# Altium PCB PDB_OS3_AlimentationV2.PcbDoc
Units mm, origin at the board's own origin, x right, y up, seen from the top; angles counter-clockwise.
Board outline 60.2 x 55.21 mm, 4 copper layers (Top Layer, Int1, In2, Bottom Layer), stack 1.552 mm thick; 11 components, 2 nets, 38 pads, 161 vias.
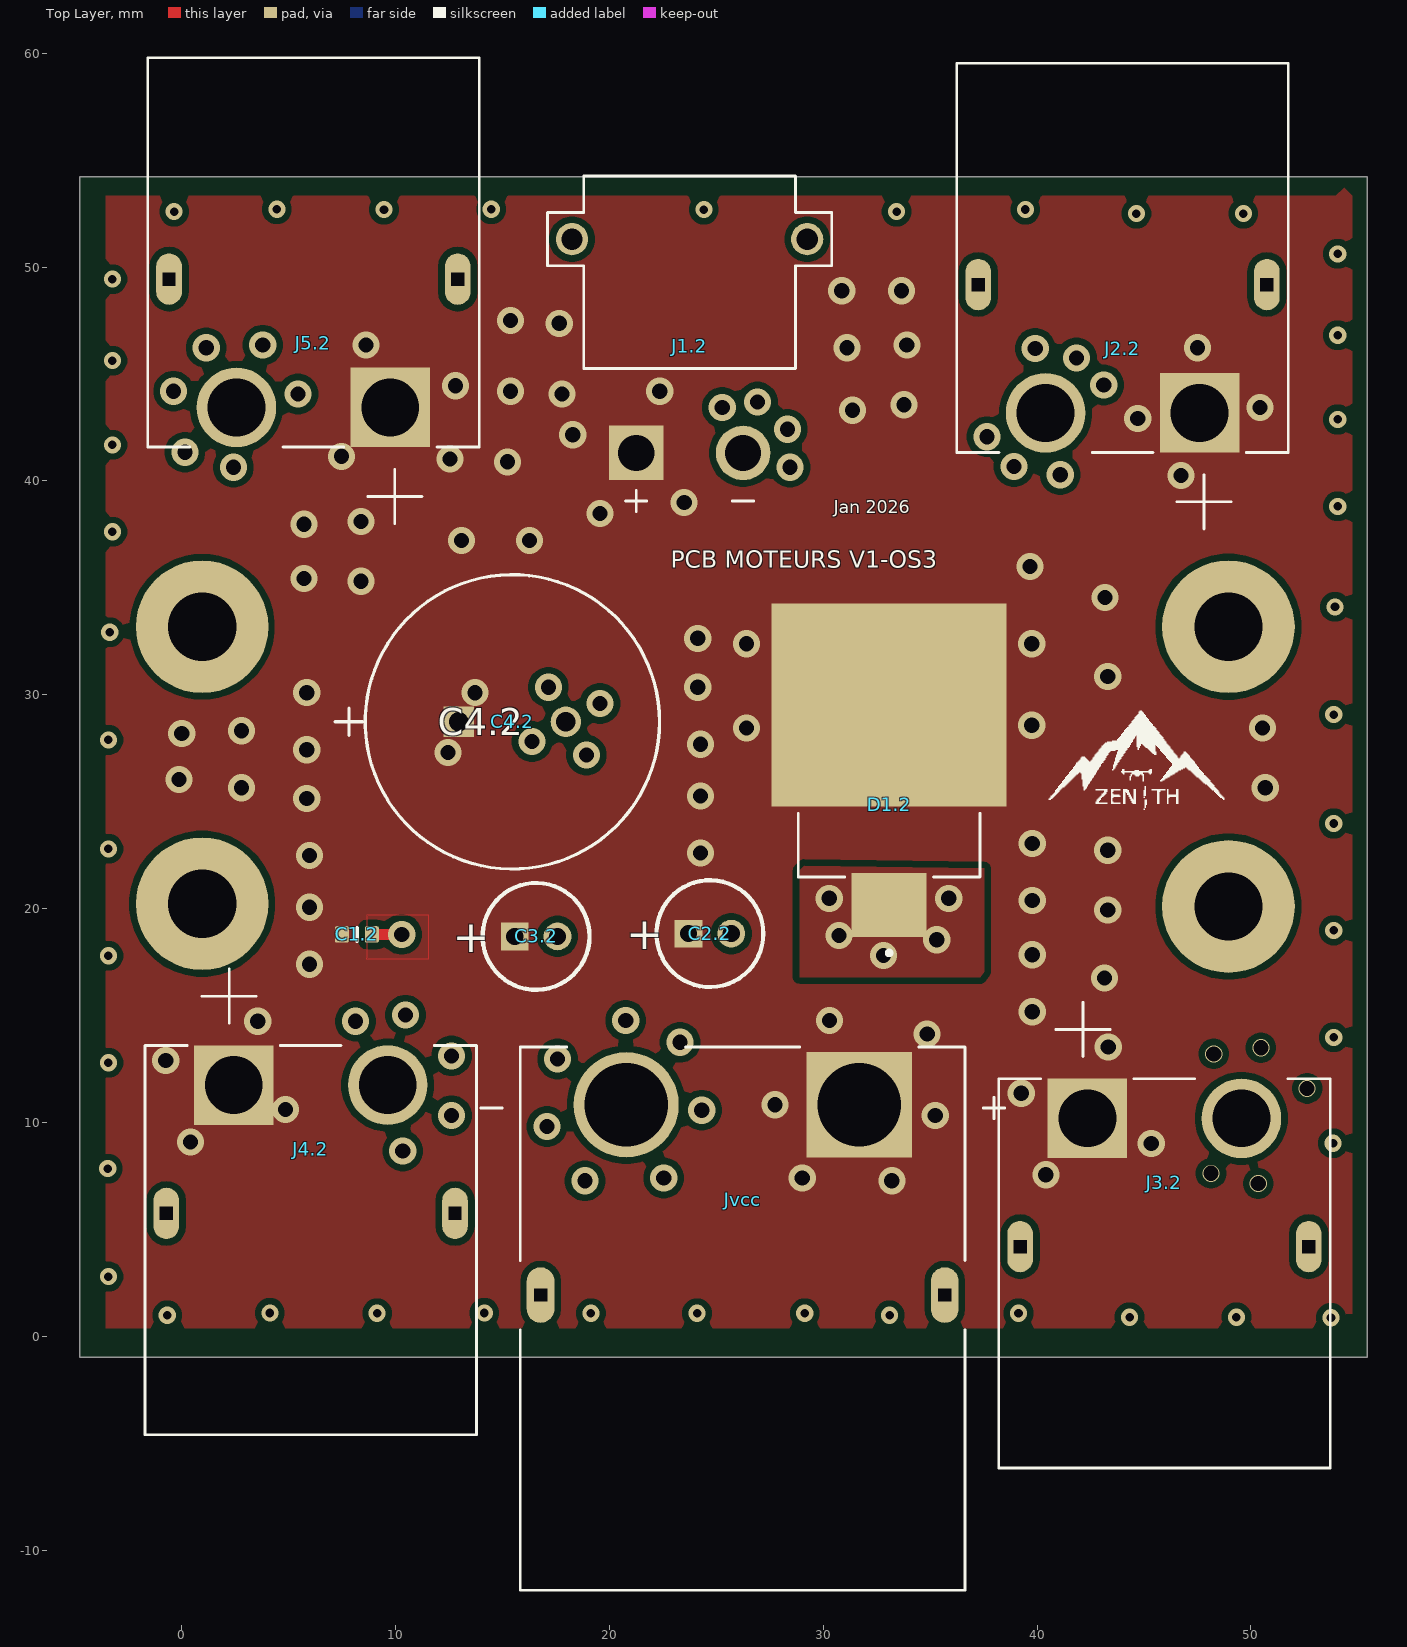
[diagram p0: Top Layer view]
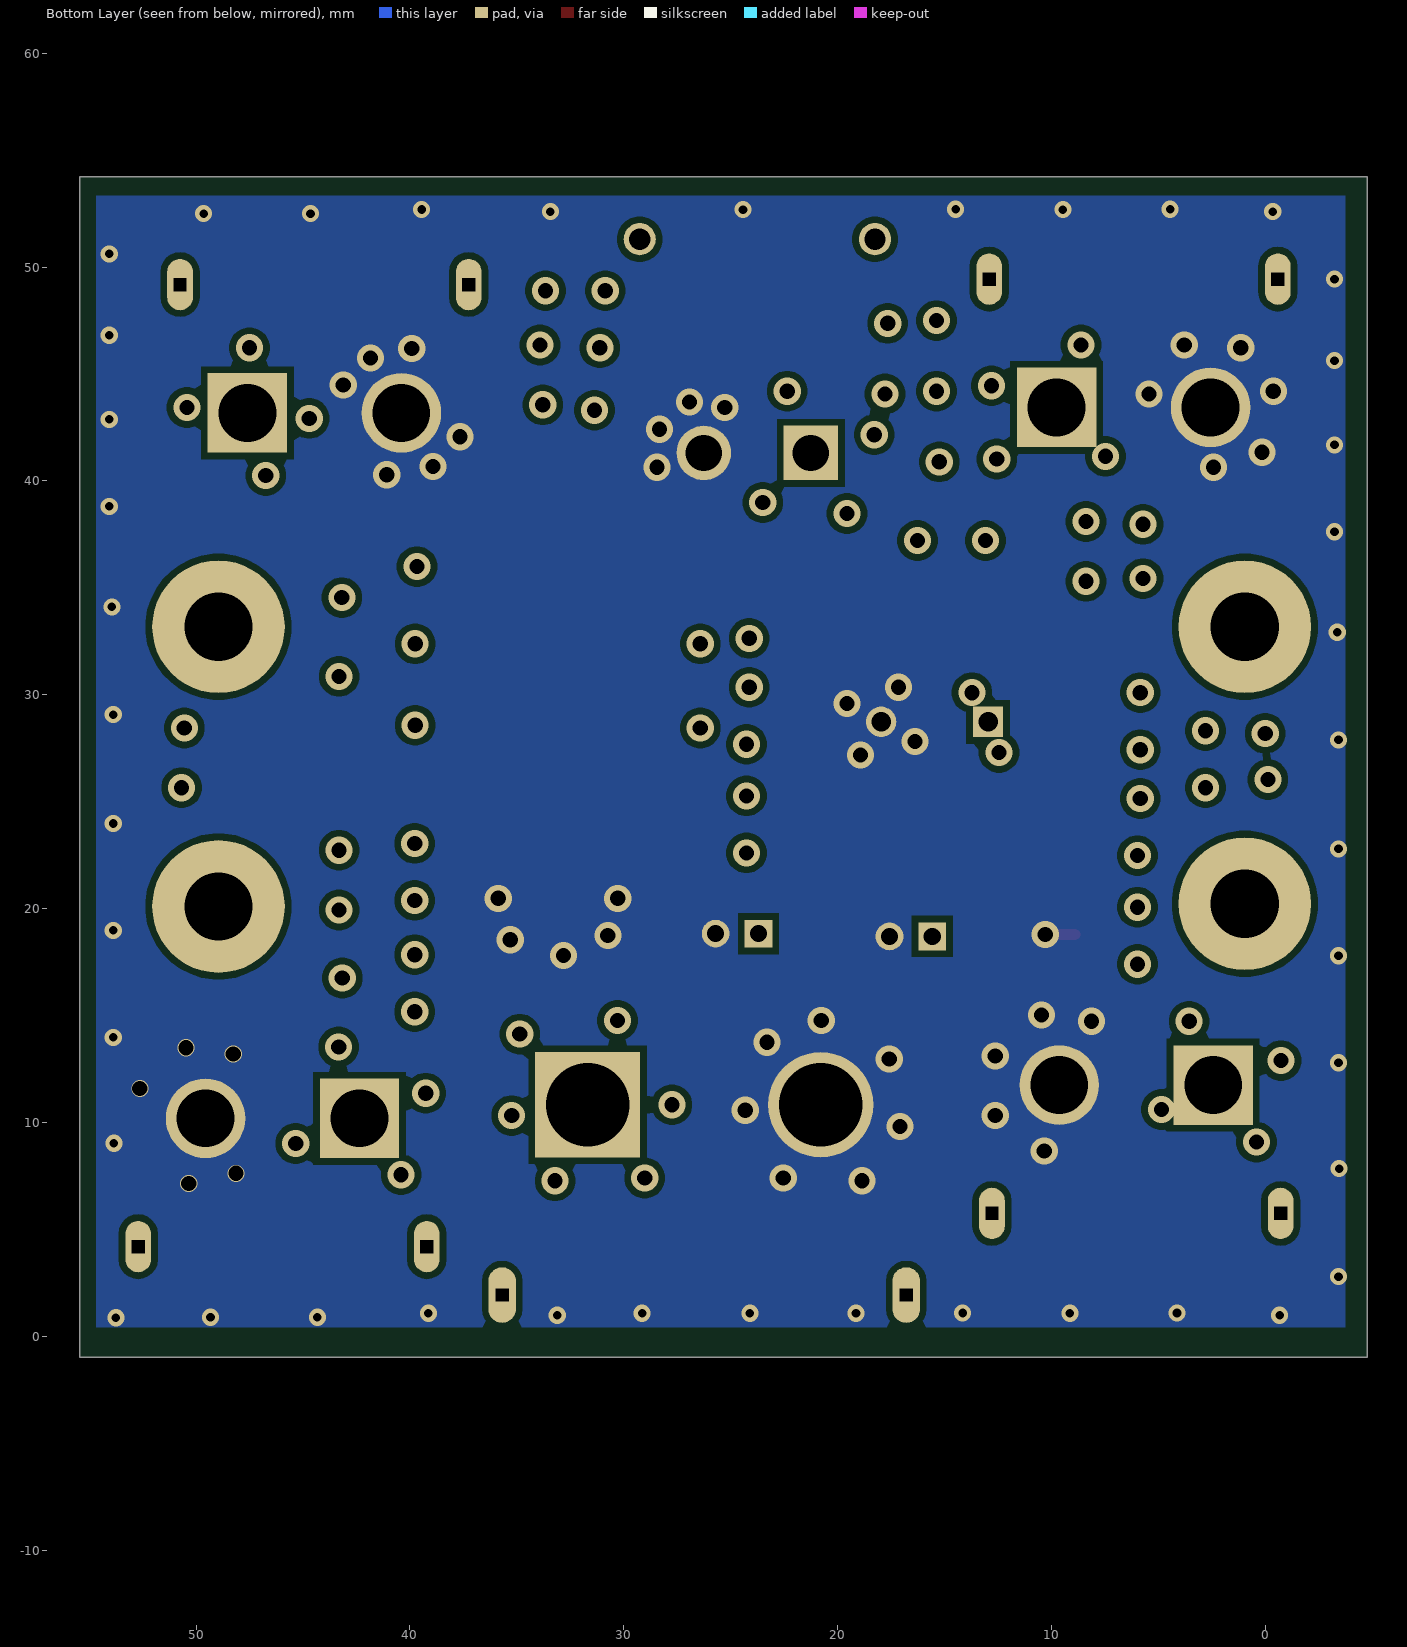
[diagram p1: Bottom Layer view, seen from below]
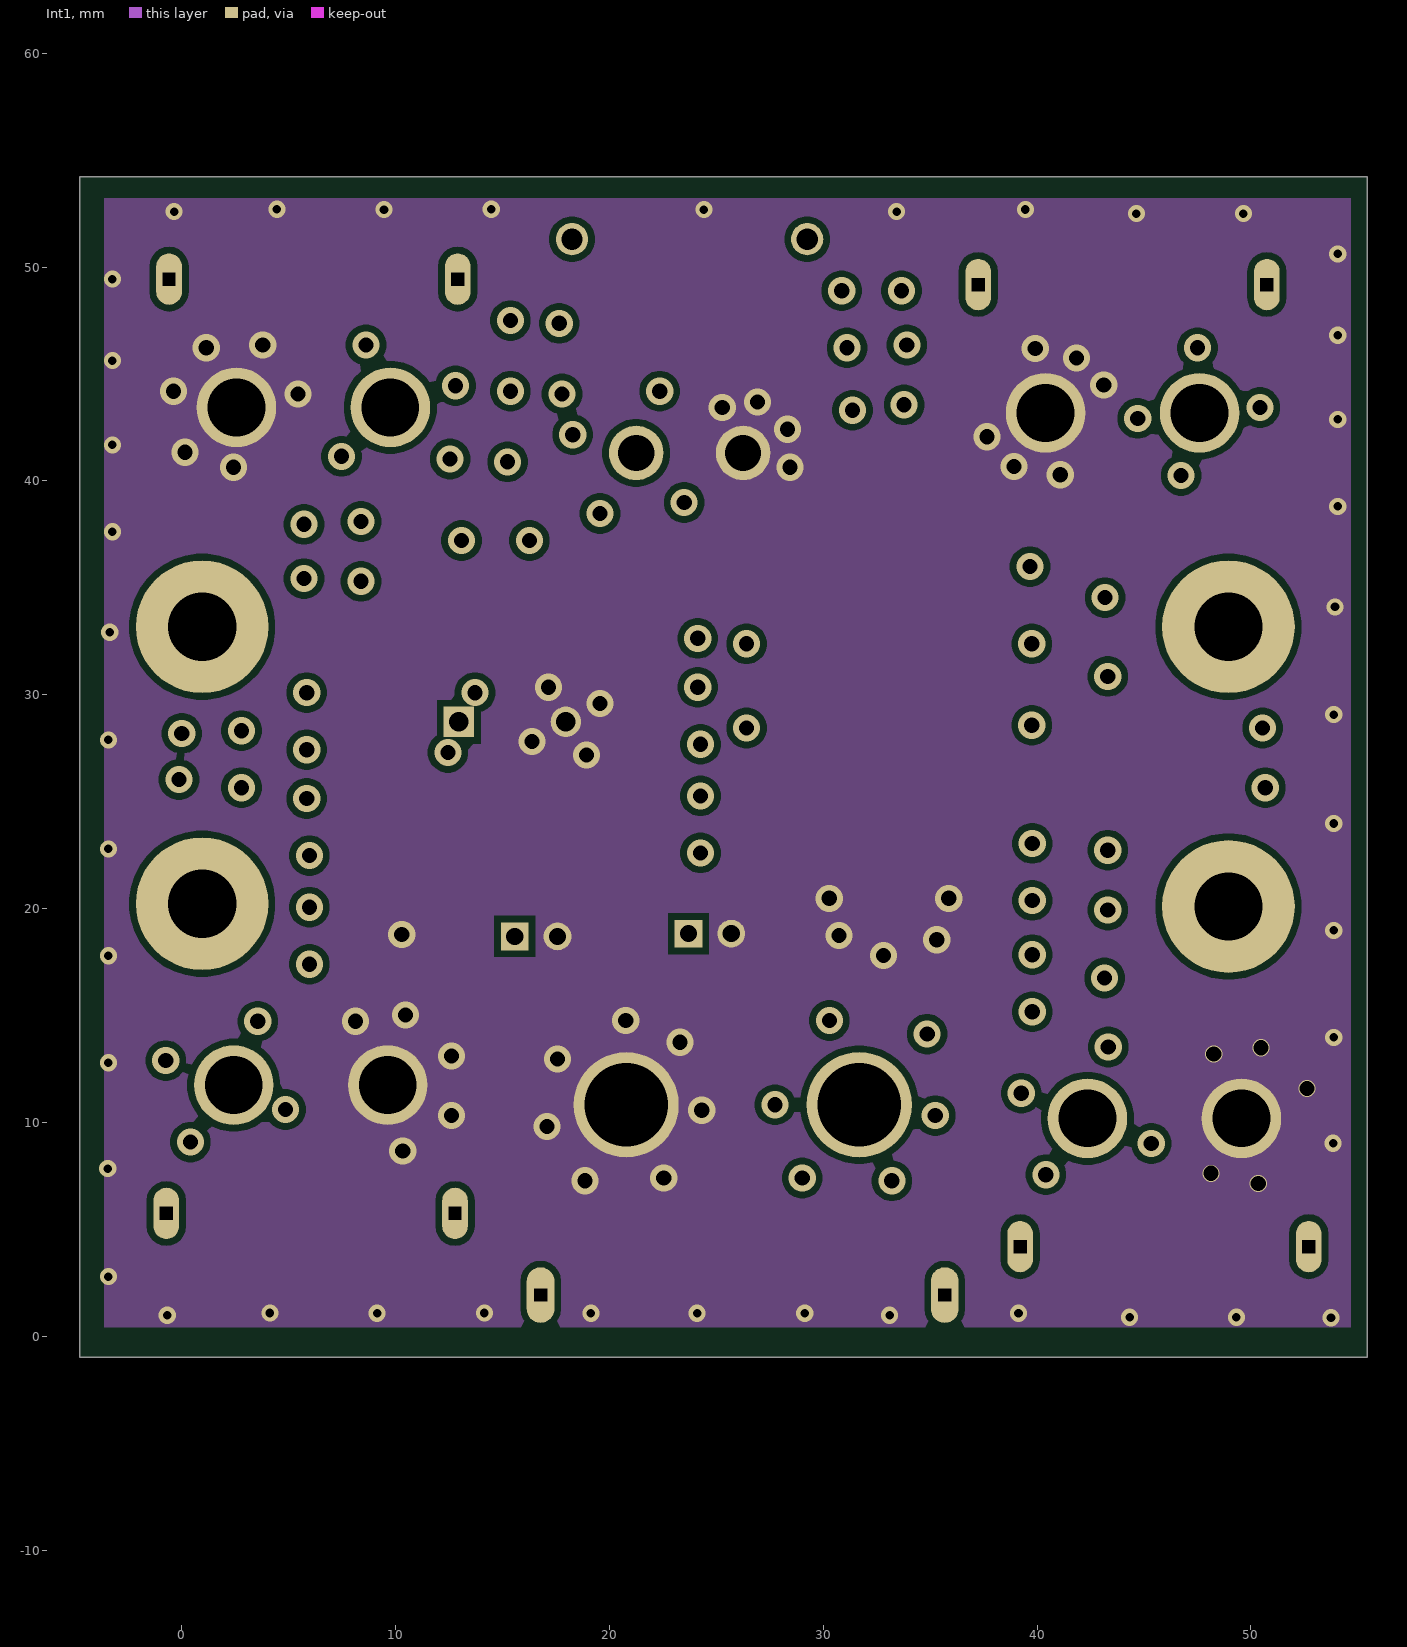
[diagram p2: Int1]
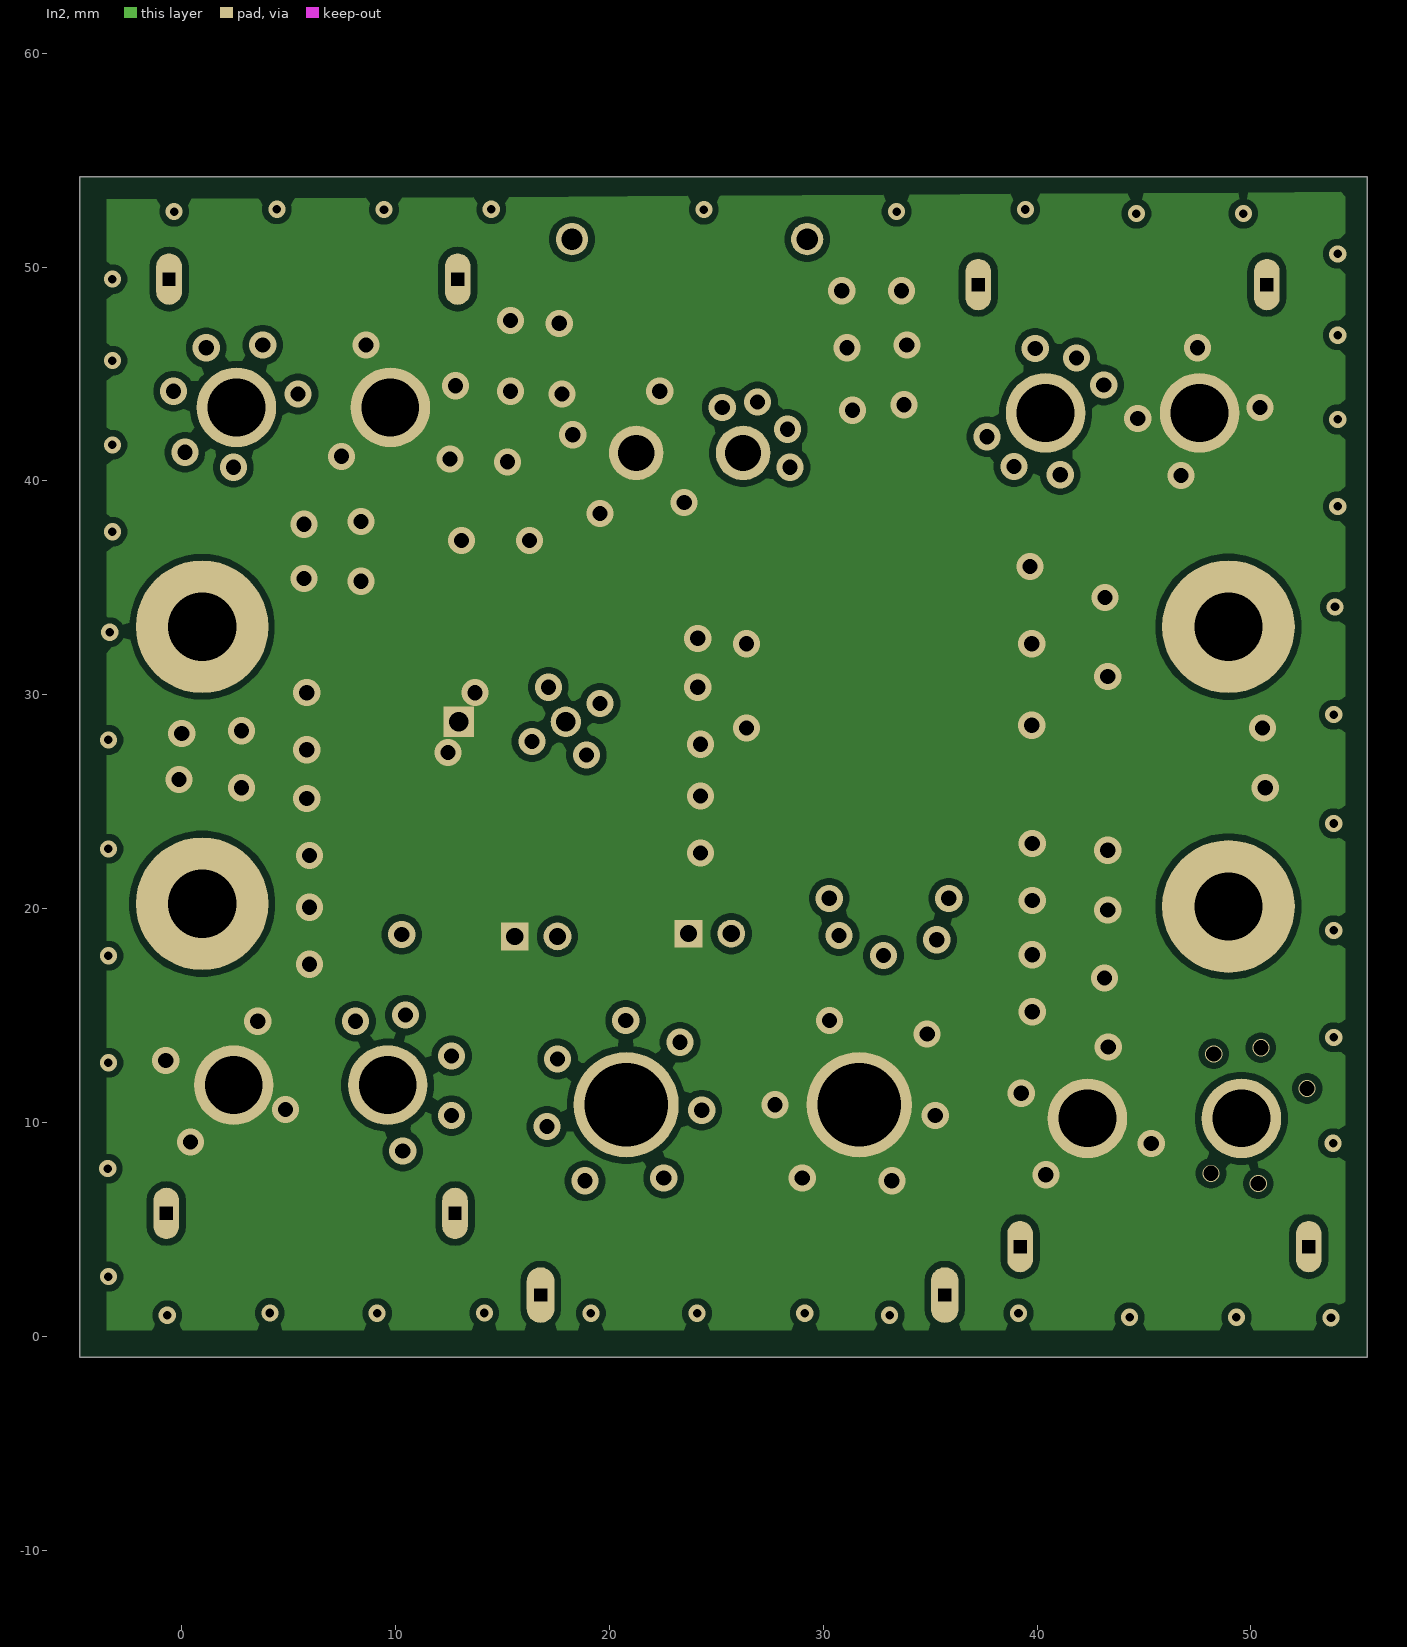
[diagram p3: In2]
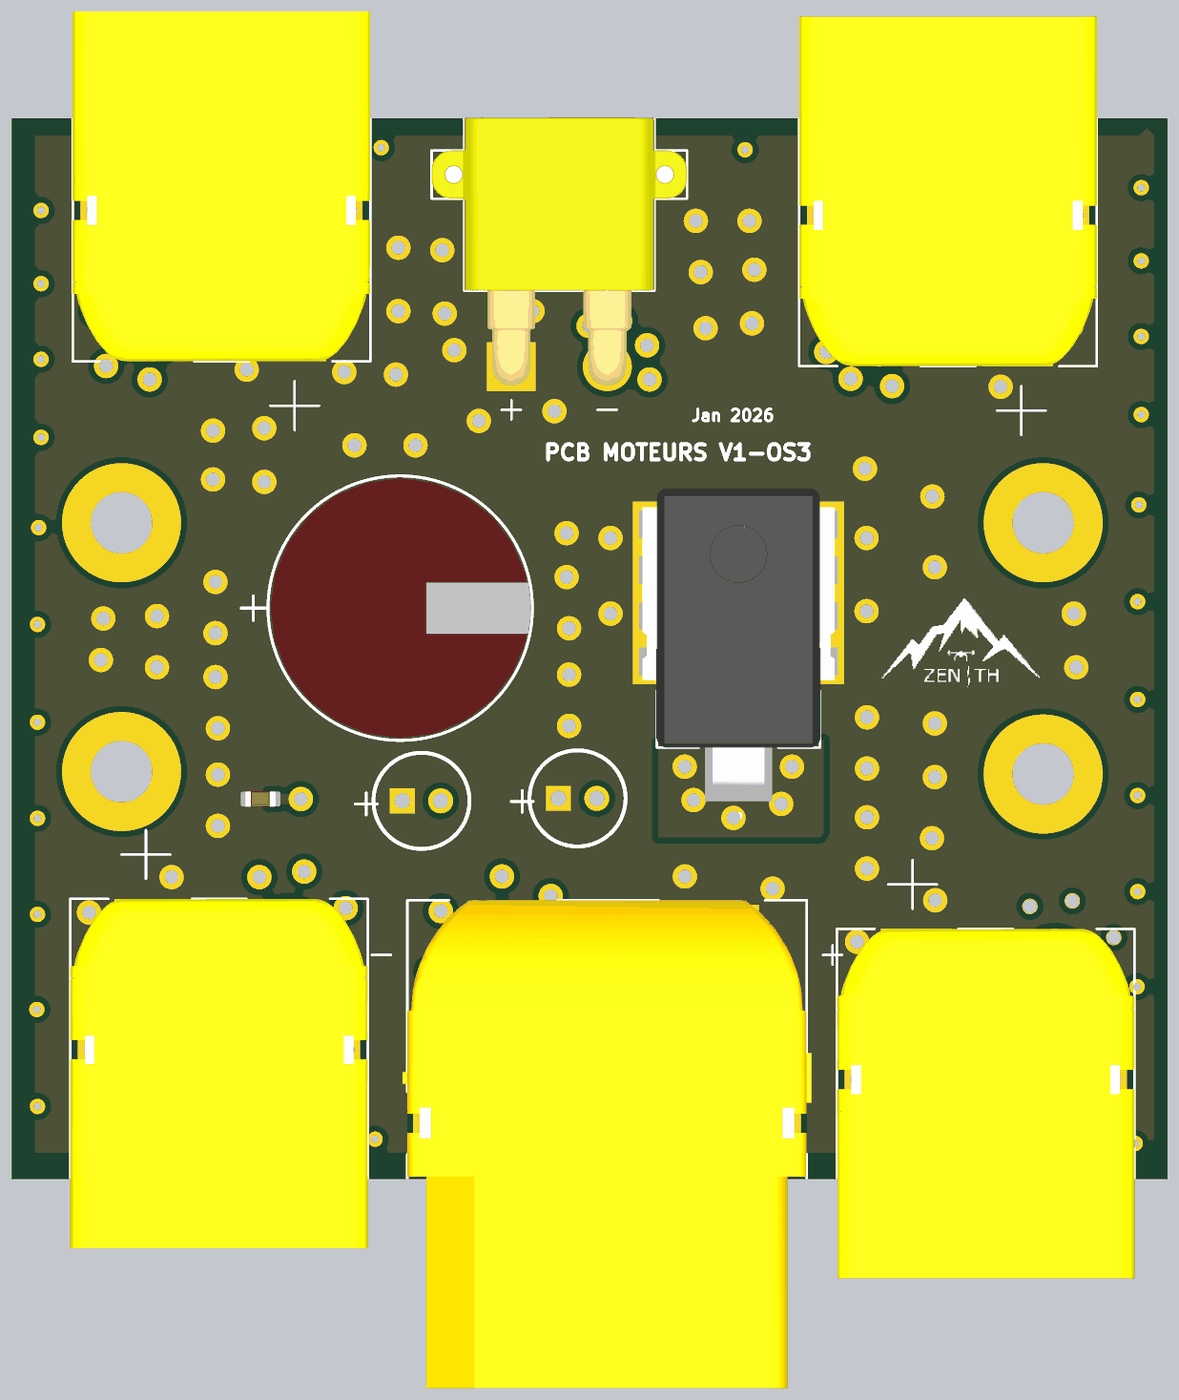
[diagram p4: 3D render of the assembled board from above, using the file's embedded part models]

## Layer stack, top to bottom
Top Solder: solder mask 0.0102, Solder Resist, Dk 3.5
Top Layer: signal copper 0.07
Dielectric 2: prepreg 0.0711, PP-006, Dk 4.9
Int1: signal copper 0.035
Dielectric 1: dielectric 1.2, FR-4, Dk 4.8
In2: signal copper 0.035
Dielectric 3: prepreg 0.0711, PP-006, Dk 4.9
Bottom Layer: signal copper 0.07
Bottom Solder: solder mask 0.0102, Solder Resist, Dk 3.5

## Board outline
55.432,-0.983 55.432,54.229 -4.766,54.229 -4.766,-0.983

## Design rules (kind name [scope] priority, off if disabled: settings)
AcuteAngle [All] p1: minimum=3.00000000000000E+0001 checktracksonly=FALSE
Clearance [All] p1: gap=0.305 ignorepadtopadclearanceinfootprint=TRUE except(0: Arc-Hole Track-Hole SMDPad-Hole THPad-Hole Via-Hole Fill-Hole Poly-Hole Region-Hole; 0.152: SMDPad-SMDPad SMDPad-THPad SMDPad-Via; 0.254: Arc-Text Track-Text SMDPad-Text THPad-Text Via-Via Via-Text Fill-Text Poly-Text Region-Text Text-Text; 0.381: Arc-Arc Arc-Track Arc-SMDPad Arc-THPad Arc-Via Track-Track Track-SMDPad Track-THPad Track-Via THPad-THPad THPad-Via)
ComponentClearance [All] p1: gap=0.508 collisioncheckmode=3 verticalgap=0.508 showdistances=TRUE
DiffPairsRouting [All] p1: maxlimit=1.27 minlimit=0.254 mostfreqgap=0.305 toplayer_mingap=0.305 toplayer_minwidth=0.305 toplayer_maxwidth=0.66 toplayer_prefwidth=0.508 midlayer1_maxgap=0.254 midlayer1_prefgap=0.254 midlayer1_minwidth=0.381 midlayer1_maxwidth=0.381 midlayer1_prefwidth=0.381 midlayer2_maxgap=0.254 midlayer2_prefgap=0.254 midlayer2_minwidth=0.381 midlayer2_maxwidth=0.381 midlayer2_prefwidth=0.381 bottomlayer_mingap=0.305 bottomlayer_minwidth=0.305 bottomlayer_maxwidth=0.66 bottomlayer_prefwidth=0.508 maxuncoupledlength=0.508
Height [All] p1: minheight=0 maxheight=25.4 prefheight=25.4
HoleSize [All] p1: absolutevalues=TRUE maxlimit=3.25 minlimit=0.3 maxpercent=80.000 minpercent=20.000
HoleToHoleClearance [All] p1: gap=0.508 allowstackedmicrovias=TRUE
LayerPairs [All] p1: enforce=FALSE
MinimumAnnularRing [All] p1: minimumring=0.203
MinimumSolderMaskSliver [All] p1: minsoldermaskwidth=0
PermittedLayers [All] p1: toplayerpermitted=TRUE bottomlayerpermitted=TRUE
PlaneConnect [All] p1: planeconnectstyle=Relief reliefexpansion=0.508 reliefentries=4 reliefconductorwidth=0.508 reliefairgap=0.254
PolygonConnect [All] p1: connectstyle=Direct reliefconductorwidth=0.508 reliefentries=4 polygonreliefangle="45 Angle" airgapwidth=0.381
RoutingCorners [All] p1: cornerstyle=45-Degree minsetback=0.508 maxsetback=2.54
RoutingVias [All] p1: holewidth=0.8 width=1.27 viastyle="Through Hole" minholewidth=0.6 minwidth=1.108 maxholewidth=1 maxwidth=2.032
SMDEntry [All] p1: side=TRUE corner=TRUE anyangle=TRUE
SMDNeckDown [All] p1: percent=100.000
SilkToSilkClearance [All] p1: silktosilkclearance=0
SilkToSolderMaskClearance [All] p1: minsilkscreentomaskgap=0 clearancetoexposedcopper=TRUE
SolderMaskExpansion [All] p1: expansion=0 istentingtop=FALSE
UnRoutedNet [All] p1: checkbadconnections=TRUE
Width [All] p1: maxlimit=1.27 minlimit=0.305 preferedwidth=0.508
18 further rules are at their usual default settings.

## Classes and differential pairs
component class PDB_OS3_AlimentationV2: C1.2 C2.2 C3.2 C4.2 D1.2 J1.2 J2.2 J3.2 J4.2 J5.2

## Components (designator, comment, footprint, x,y, rotation, side; value= is the part's Value field where it differs from the comment)
C1.2 "Capacitor 1µF +/-40% 50V 0603" CAPC0603(1608)100_L 8.19,18.796 r180 top value=1µF
C2.2 "ECA1HM220" CAPPR55-200-1100X500X1200 24.698,18.829 r0 top value=22µF
C3.2 "ECA1HM220" CAPPR55-200-1100X500X1200 16.57,18.702 r0 top value=22µF
C4.2 "680 uF" CAP_PY-13x20_KEM 12.961,28.735 r0 top
D1.2 "58.1 V 2800 W" TVSP_TLD8S36AH 33.08,28.227 r90 top
J1.2 "XT30PW-M" AMASS_XT30PW-M 23.749,51.308 r0 top
J2.2 "XT60PW-M" AMASS_XT60PW-M 43.996,49.182 r0 top
J3.2 "XT60PW-M" AMASS_XT60PW-M 45.955,4.191 r180 top
J4.2 "XT60PW-M" AMASS_XT60PW-M 6.029,5.748 r180 top
J5.2 "XT60PW-M" AMASS_XT60PW-M 6.156,49.436 r0 top
Jvcc "XT90PW-F" AMASS_XT90PW-F 26.233,1.928 r0 top

## Footprints (in the part's own frame and the unit in brackets; to place one, negate y for a bottom-side part, rotate by r counter-clockwise, add the part's x,y. Pads: shape width x height; smd on the part's side, far side on the other; paste and mask are expansions set on the pad)
AMASS_XT30PW-M [mm]
  round 2.55 hole 1.7: N(2.5,-10)
  rect 2.55x2.55 / inner round 2.55 / far side rect 2.55x2.55 hole 1.7: P(-2.5,-10)
  round 1.508 hole 1: S1(5.5,0) S2(-5.5,0)
  silkscreen extent -6.65,-12.75 6.65,2.95, body extent -6.65,-11 6.65,2.95, height 5
AMASS_XT60PW-M [mm]
  rect 3.716x3.716 / inner round 3.716 / far side rect 3.716x3.716 hole 2.7: 1(3.6,-6)
  round 3.716 hole 2.7: 2(-3.6,-6)
  oval 1.2x2.4 hole 0.6 square: S1(6.75,0) S2(-6.75,0)
  silkscreen extent -7.75,-11.43 7.75,10.35, body extent -7.75,-7.85 7.75,10.35, height 8.4
AMASS_XT90PW-F [mm]
  round 4.916 hole 3.9: N(-5.45,8.9)
  rect 4.916x4.916 / inner round 4.916 / far side rect 4.916x4.916 hole 3.9: P(5.45,8.9)
  oval 1.3x2.6 hole 0.6 square: S1(9.45,0) S2(-9.45,0)
  silkscreen extent -12.25,-13.8 12.25,11.6, body extent -10.65,-13.8 10.65,11.6, height 10.3
CAP_PY-13x20_KEM [mil]
  rect 56x56 hole 36 paste-99999 mask+0: 1(0,0)
  round 56 hole 36 paste-99999 mask+0: 2(196.85,0)
  silkscreen extent -228,-271 369,271, body extent -168,-266 366,266, height 857
CAPC0603(1608)100_L [mm] "Chip Capacitor, Body 1.6x0.8mm, Height 1.0mm, IPC High Density"
  rrect25% 0.66x0.76 smd: 1(-0.7,0) 2(0.7,0)
  silkscreen extent 0,-0.3 0,0.3, body extent -0.8,-0.4 0.8,0.4, height 0.95
CAPPR55-200-1100X500X1200 [mm] "THD, 2-Leads, Dia 5mm, Pin Spacing 2mm"
  rect 1.3x1.3 hole 0.8: 1(-1,0)
  round 1.3 hole 0.8: 2(1,0)
  silkscreen extent -2.5,-2.5 2.5,2.5, body extent -2.5,-2.5 2.45,2.5, height 12
TVSP_TLD8S36AH [mm]
  rect 9.5x11 smd paste-7: A(1.3,0)
  rect 3x3.5 smd: C(-8.05,0)
  silkscreen extent -10.4,-4.25 -3.77,4.25, body extent -8.75,-5 6.75,5, height 5.5

## Part data
C1.2: library part CMP-001-00078-4, "Chip Capacitor, 1µF +/-40%, 50V, 0603, Thickness 1 mm", Case/Package=0603, Max Operating Temperature=85°C, Min Operating Temperature=-55°C, Tolerance=10%, Voltage Rating=50V, ComponentLink1Description="Manufacturer Link", ComponentLink1URL=https://www.digikey.ca/fr/products/detail/samsung-electro-mechanics/CL10A105KB8NNNC/3887518?msockid=24619636816564831ea7832b805e650e, Mounting Technology=SMT, Pins=2
C2.2 C3.2: library part CMP-001-00027-7, "Aluminum Electrolytic Capacitor, 22 uF, +/- 20%, 50 V, -40 to 85 degC, 2-Pin THD, RoHS, Bulk", Capacitor Type=Electrolytic, Case/Package=Radial, Manufacturer=Panasonic, Max Operating Temperature=85°C, Min Operating Temperature=-40°C, Package Description="2-Pin Radial Lead, Dia 5 mm, Height 12 mm", Package Quantity=200, Package Reference=CAPPR55-200-1100X500X1200, Ripple Current=100mA, Tolerance=20%, Voltage Rating=50V, Datasheet URL=https://industrial.panasonic.com/cdbs/www-data/pdf/RDF0000/ABA0000C1218.pdf, Datasheet Version="Rev. 05, 10/2016", Diameter=5mm, Lead Pitch=2mm, Manufacturer URL=http://www.panasonic.com/, Mounting Technology=TH, Packaging=Bulk, Pins=2, Ripple Current (AC)=100mA, RoHS Compliant=True
C4.2: library part CAP_PY-13x20_KEM, "680 uF Capacitor Through Hole", ComponentLink1Description="Manufacturer Link", ComponentLink1URL=https://www.digikey.ca/fr/products/detail/kemet/A759PY687M1HAAE026/6196519?s=N4IgjCBcoEwAwBYCcVQGMoDMCGAbAzgKYA0IA9lANogBsAHHAAQCtAYiALqkAOALlCACqAOwCWvAPKYAsoWz4ArgCdCIAL6l4AdhTQQGSDgIlyVEAFYmANU49%2BkIWMky5iletIBaGKn1ReSgomFJDU5pxqGiA%2BofrY3Nho4mRKEUA
D1.2: library part TVSP_TLD8S36AH, "Diode TVS 2800 W Unidirectionnelle", ComponentLink1Description="Manufacturer Link", ComponentLink1URL=https://www.digikey.ca/en/products/detail/taiwan-semiconductor-corporation/TLD5S36AH/9659228
J1.2: "Socket; DC supply; XT30; male; PIN: 2; on PCBs; THT; Colour: yellow", Package=None, Check_prices=https://www.snapeda.com/parts/XT30PW-M/AMASS/view-part/?ref=eda, MF=AMASS, MP=XT30PW-M, SnapEDA_Link=https://www.snapeda.com/parts/XT30PW-M/AMASS/view-part/?ref=snap
J2.2 J3.2 J4.2 J5.2: "Socket, DC supply, male, PIN: 2", Package=Package, Availability="Not in stock", Check_prices=https://www.snapeda.com/parts/XT60PW-M/AMASS/view-part/?ref=eda, MF=AMASS, MP=XT60PW-M, Price=None, SnapEDA_Link=https://www.snapeda.com/parts/XT60PW-M/AMASS/view-part/?ref=snap
Jvcc: "Socket, DC supply, XT90, female, PIN:2, on PCBs, THT", Package=Package, Check_prices=https://www.snapeda.com/parts/XT90PW-F/AMASS/view-part/?ref=eda, MF=AMASS, MP=XT90PW-F, SnapEDA_Link=https://www.snapeda.com/parts/XT90PW-F/AMASS/view-part/?ref=snap

## Free pads (board coordinates)
  round 6.2 hole 3.2 unplated: 3(0.949,20.226) 3(0.949,33.18) 3(48.949,20.099) 3(48.949,33.18)

## Via types
v1: diameter 1.27, hole 0.711, Top Layer to Bottom Layer, 114 vias
v2: diameter 0.8, hole 0.4, Top Layer to Bottom Layer, 42 vias
v3: diameter 0.8, hole 0.711, Top Layer to Bottom Layer, 5 vias

## Nets (pads, with @x,y where several pads share a name; then routed paths per layer and width w, separated by ;. In a path a pad name is that pad's centre, name@x,y a point inside that pad or via, vN(x,y) a via of type N, cw(c..) or ccw(c..) an arc to the next point about the centre after c; other vN are vias at no path point)
GND: C1.2.1 C2.2.2 C3.2.2 C4.2.2 D1.2.C J1.2.N J2.2.2 J3.2.2 J4.2.2 J5.2.2 Jvcc.N | length 1.4
  Top Layer w0.508: C1.2.1 v1(10.287,18.796)
  other v1: 18.856,7.272 22.539,7.399 10.335,8.669 17.078,9.812 12.621,10.32 24.317,10.574 17.578,12.965 12.621,13.114 23.301,13.749 8.128,14.732 20.761,14.765 10.462,15.019 32.82,17.813 35.306,18.542 30.74,18.742 30.28,20.48 35.868,20.48 18.923,27.178 16.383,27.813 19.558,29.591 17.145,30.353 41.081,40.292 2.413,40.64 28.448,40.64 38.922,40.673 0.146,41.341 37.652,42.07 28.321,42.418 25.273,43.434 26.924,43.688 5.438,44.065 -0.381,44.196 43.113,44.483 41.843,45.753 39.913,46.196 1.143,46.228 3.787,46.351
  other v2: 53.744,0.866 44.323,0.889 49.323,0.889 -0.677,0.982 33.105,0.982 9.136,1.076 19.136,1.076 24.097,1.076 29.136,1.076 4.123,1.09 14.152,1.09 39.13,1.079 -3.429,2.794 -3.461,7.841 53.839,9.027 -3.429,12.794 53.871,13.98 -3.429,17.794 53.871,18.98 -3.429,22.794 53.871,23.98 -3.429,27.888 53.871,29.074 -3.369,32.926 53.931,34.112 -3.242,37.625 54.058,38.811 -3.242,41.689 54.058,42.875 -3.242,45.626 54.058,46.812 -3.242,49.436 54.058,50.622 44.645,52.504 49.645,52.504 -0.355,52.597 33.427,52.597 4.445,52.705 9.458,52.691 14.475,52.705 24.419,52.691 39.452,52.694
  other v3: 50.34,7.145 48.133,7.62 52.626,11.59 48.26,13.208 50.467,13.495
Net_P: C1.2.2 C2.2.1 C3.2.1 C4.2.1 D1.2.A J1.2.P J2.2.1 J3.2.1 J4.2.1 J5.2.1 Jvcc.P
  other v1: 33.207,7.272 29.016,7.399 40.408,7.557 45.339,9.017 0.403,9.081 35.239,10.32 4.848,10.605 27.746,10.828 39.259,11.367 -0.746,12.891 43.329,13.526 34.858,14.13 3.556,14.732 30.286,14.765 39.773,15.177 43.158,16.756 5.969,17.399 39.773,17.844 43.307,19.939 5.969,20.066 39.773,20.384 5.969,22.479 24.257,22.606 43.307,22.733 39.773,23.051 5.842,25.146 24.257,25.273 2.794,25.654 50.673,25.654 -0.127,26.035 12.446,27.305 5.842,27.432 24.257,27.686 0,28.194 2.794,28.321 26.416,28.448 50.546,28.448 39.751,28.575 5.842,30.099 13.716,30.099 24.13,30.353 43.307,30.861 26.416,32.385 39.751,32.385 24.13,32.639 43.18,34.544 8.382,35.306 5.715,35.433 39.667,35.993 13.081,37.211 16.256,37.211 5.715,37.973 8.382,38.1 19.558,38.481 23.495,38.989 46.736,40.259 15.24,40.894 12.55,41.023 7.47,41.15 18.282,42.164 44.704,42.926 31.369,43.307 50.419,43.434 33.782,43.561 17.78,44.069 15.367,44.196 22.352,44.196 12.804,44.452 31.115,46.228 47.498,46.228 8.613,46.357 33.909,46.355 17.653,47.371 15.367,47.498 30.861,48.895 33.655,48.895
pads on no net: J1.2.S1 J1.2.S2 J2.2.S1 J2.2.S2 J3.2.S1 J3.2.S2 J4.2.S1 J4.2.S2 J5.2.S1 J5.2.S2 Jvcc.S1 Jvcc.S2

## Polygon pours and split planes (outlines as drawn)
Net_P on Top Layer "NET_P_L01_P017" (solid, pour order 17): -3.556,0.381 54.737,0.381 54.737,53.34 54.356,53.721 53.975,53.34 -3.556,53.34
GND on Top Layer "GND_L01_P018" (solid, pour order 18): 8.642,19.687 8.642,17.659 8.636,17.653 11.557,17.653 11.557,19.685
GND on Top Layer "GND_L01_P016" (solid, pour order 16): 28.889,22.004 28.889,16.797 37.525,16.797 37.652,16.924 37.525,17.051 37.525,21.877
GND on Int1 "GND_L02_P002" (solid, pour order 2): -3.629,53.213 54.664,53.213 54.664,0.414 -3.629,0.414
GND on Bottom Layer "GND_L04_P001" (solid, pour order 1): -3.756,53.34 54.664,53.34 54.664,0.414 -3.756,0.414
Net_P on In2 "NET_P_L03_P004" (solid, pour order 4): -3.502,53.164 54.41,53.515 54.41,0.287 -3.502,0.287

## Silkscreen, mask and mechanical layers (free items; w line width, h text height)
Top Overlay:
  drawing of 14 lines, arcs and shapes, not listed
  text "Jan 2026" at 30.48,38.481 h0.6
  text "PCB MOTEURS V1-OS3" at 22.86,35.941 h0.8

## Text inside footprints (layer, text, board x,y; h text height)
C2.2: Top Overlay "+" at 20.79,18.092 h1.5
C3.2: Top Overlay "+" at 12.662,17.965 h1.5